# EAGLE board transmitter (EAGLE 5.11)
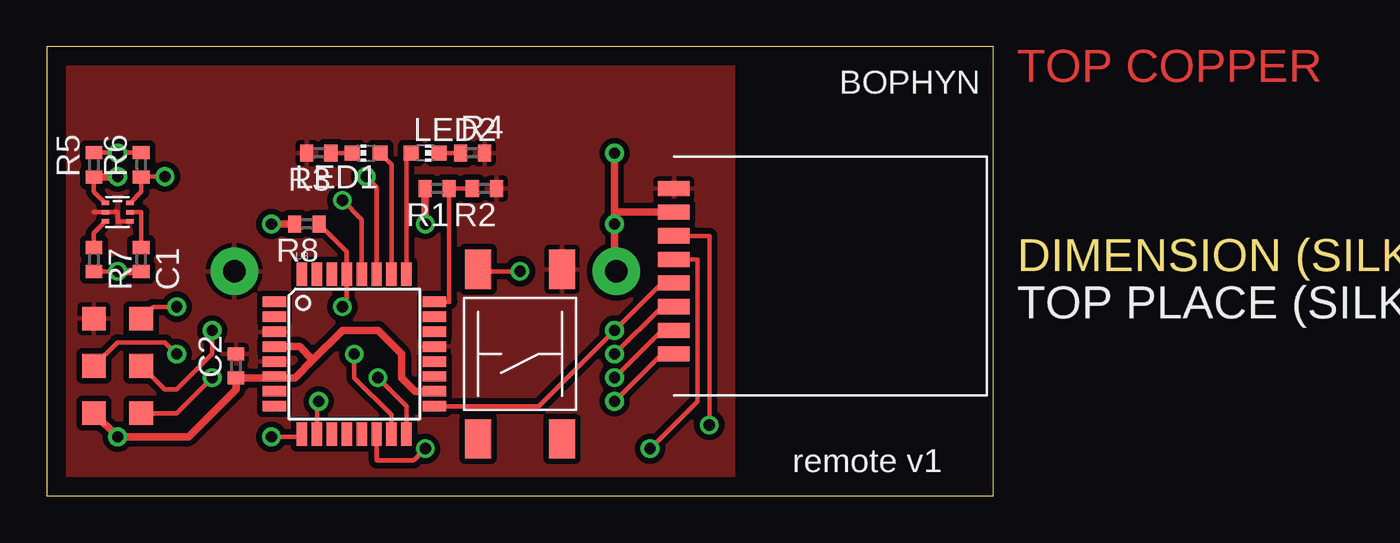
[diagram p0: board, top side]
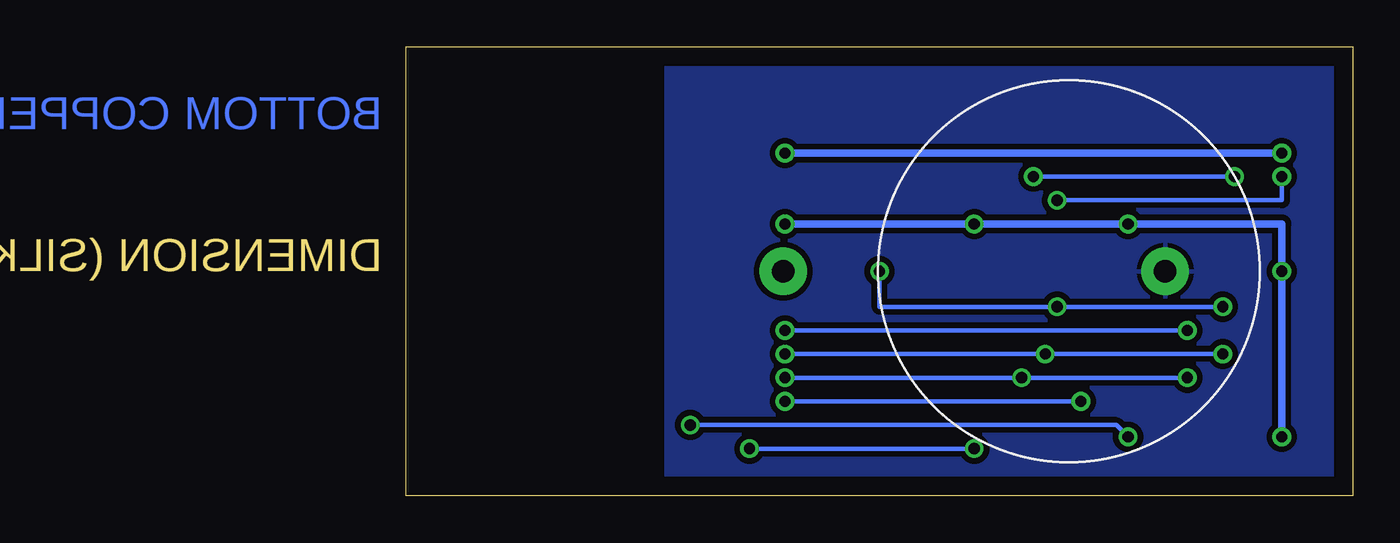
[diagram p1: board, bottom side, seen from below]

Size 50.8 x 24.13 mm. Coordinates in mm from the lower left corner, seen from the top.
Outline: 0,0 50.8,0 50.8,24.13 0,24.13 0,0
Copper layers (1*16): Top 0.035mm / dielectric 1.5mm / Bottom 0.035mm
Design rules "8mils": minimum track width 8mil, minimum drill 0.6mm, track to track 8mil, track to pad 8mil, pad to pad 8mil, via to via 8mil, smd to smd 8mil, copper to edge 40mil, drill to drill 10mil, minimum pad ring 10mil, minimum via ring 8mil, stop-mask expansion 0mil, vias tented up to drill 0mil, thermal gap 10mil

## Footprints (pad centres in the part's own frame; a part is rotated, then mirrored left to right if it is on the bottom)
C0402 = smd 0.7 x 0.9: 1 -0.65,0; 2 0.65,0
CHIP-LED0603 = smd 0.8 x 0.8: A 0,-0.75; C 0,0.75
R0402 = smd 0.7 x 0.9: 1 -0.65,0; 2 0.65,0
CUSTOM = smd 0.813 x 1.676: CE 2.54,0; CSN 3.81,0; GND 0,0; IRQ 8.89,0; MISO 7.62,0; MOSI 6.35,0; SCK 5.08,0; VDD 1.27,0
SOT563 = smd 0.25 x 0.4: 1 -0.5,-0.66; 2 0,-0.66; 3 0.5,-0.66; 4 0.5,0.66; 5 0,0.66; 6 -0.5,0.67
TQFP32-08 = smd 1.27 x 0.559: 1 -4.293,2.8; 2 -4.293,2; 3 -4.293,1.2; 4 -4.293,0.4; 5 -4.293,-0.4; 6 -4.293,-1.2; 7 -4.293,-2; 8 -4.293,-2.8; 17 4.293,-2.8; 18 4.293,-2; 19 4.293,-1.2; 20 4.293,-0.4; 21 4.293,0.4; 22 4.293,1.2; 23 4.293,2; 24 4.293,2.8 | smd 0.559 x 1.27: 9 -2.8,-4.293; 10 -2,-4.293; 11 -1.2,-4.293; 12 -0.4,-4.293; 13 0.4,-4.293; 14 1.2,-4.293; 15 2,-4.293; 16 2.8,-4.293; 25 2.8,4.293; 26 2,4.293; 27 1.2,4.293; 28 0.4,4.293; 29 -0.4,4.293; 30 -1.2,4.293; 31 -2,4.293; 32 -2.8,4.293
ISP-6 = smd 1.27 x 1.27: 1 0,0; 2 0,2.54; 3 2.54,0; 4 2.54,2.54; 5 5.08,0; 6 5.08,2.54
CR2032 = drill 1.2 pad 2.54 round: + -10.25,0; - 10.25,0
FSM4JSMA = smd 1.4 x 2.1: 1 2.25,4.55; 2 2.25,-4.55; 3 -2.25,4.55; 4 -2.25,-4.55

## Placement (x,y rotation side)
C1  0.1uF  [C0402]  5.08,12.7 270 top
C2  0.1uF  [C0402]  10.16,6.99 90 top
LED1  RED  [CHIP-LED0603]  17.14,18.41 90 top
LED2  GREEN  [CHIP-LED0603]  20.32,18.41 270 top
R1  1M  [R0402]  20.95,16.51 180 top
R2  500K  [R0402]  23.5,16.51 180 top
R3  1K  [R0402]  14.61,18.41 180 top
R4  1K  [R0402]  22.86,18.41 0 top
R5  1k  [R0402]  2.54,17.78 90 top
R6  1k  [R0402]  5.08,17.78 90 top
R7  1k  [R0402]  2.54,12.7 270 top
R8  10K  [R0402]  13.97,14.61 180 top
RFM70  RFM70-DEVICE  [CUSTOM]  33.66,16.51 270 top
U1  TMP102  [SOT563]  3.81,15.24 270 top
U3  ATMEGA168  [TQFP32-08]  16.51,7.62 0 top
U$2  ISP-6  [ISP-6]  5.08,4.45 90 top
U$3  CR2032  [CR2032]  20.32,12.06 0 bottom
U$4  FSM4JSMA  [FSM4JSMA]  25.4,7.62 180 top

## Library data of the parts
C1 C2 R1-R8 = resistor
LED1 LED2 = led
RFM70 U$2-U$4 = custom
U1 U3 = SparkFun

## Nets
GND: C2.2 R2.1 R3.2 R4.2 RFM70.GND U1.2 U1.4 U3.3 U3.5 U3.21 U$2.6 U$3.- U$4.4
GREEN_LED: LED2.A U3.25
MISO: RFM70.MISO U3.16 U$2.1
MOSI: RFM70.MOSI U3.15 U$2.4
N$1: LED1.C R3.1
N$2: LED2.C R4.1
N$3: R7.1 U1.3
N$4: C1.1 U1.5
RADIO_ENABLE: RFM70.CE U3.9
RADIO_IRQ: RFM70.IRQ U3.10
RED_LED: LED1.A U3.26
RESET: R8.1 U3.29 U$2.5 U$4.2
SCK: RFM70.SCK U3.17 U$2.3
SCL: R5.1 U1.1 U3.28
SDA: R6.1 U1.6 U3.27
SS: RFM70.CSN U3.14
VCC: C1.2 C2.1 R1.2 R5.2 R6.2 R7.2 R8.2 RFM70.VDD U3.4 U3.6 U3.18 U$2.2 U$3.+
VTEST: R1.1 R2.2 U3.24

## Tracks (layer width: path | path; a pad name or v marks a point on that pad's centre or on a via)
GND
  Top 0.254: U1.4 3.81,14.74 3.81,15.24 3.17,15.24 U1.2 2.54,15.24
  pour Top (isolate 0.305): 0,0 0,24.13 36.83,24.13 36.83,0
  pour Bottom (isolate 0.305): 0,0 0,24.13 36.83,24.13 36.83,0
GREEN_LED
  Top 0.254: U3.25 19.31,18.16 LED2.A
MISO  (via drill 0.6)
  Top 0.254: U$2.1 6.99,4.45 v8.89,6.35 | RFM70.MISO 33.02,8.89 v30.48,6.35 | U3.16 19.31,4.82 v17.78,6.35
  Bottom 0.254: v30.48,6.35 v17.78,6.35 v8.89,6.35
MOSI  (via drill 0.6)
  Top 0.254: RFM70.MOSI 33.02,10.16 v30.48,7.62 | U$2.4 3.81,8.26 6.35,8.26 v6.99,7.62 | U3.15 18.51,4.35 16.51,6.35 v16.51,7.62
  Bottom 0.254: v30.48,7.62 v16.51,7.62 v6.99,7.62
N$1
  Top 0.254: LED1.C R3.1
N$2
  Top 0.254: LED2.C R4.1
N$3
  Top 0.254: U1.3 2.54,14.13 R7.1
N$4
  Top 0.254: U1.5 5.08,15.24 C1.1
RADIO_ENABLE  (via drill 0.6)
  Top 0.254: RFM70.CE 35.56,13.97 v35.56,3.81 | v12.06,3.17 13.56,3.17 U3.9
  Bottom 0.254: v35.56,3.81 12.7,3.81 v12.06,3.17
RADIO_IRQ  (via drill 0.6)
  Top 0.254: RFM70.IRQ 33.02,7.62 v30.48,5.08 | U3.10 14.51,4.99 v14.61,5.08
  Bottom 0.254: v14.61,5.08 v30.48,5.08
RED_LED
  Top 0.254: U3.26 18.51,17.8 LED1.A
RESET  (via drill 0.6)
  Top 0.254: v15.88,10.16 16.11,10.39 U3.29 16.11,13.12 R8.1 | v6.99,10.16 5.71,10.16 U$2.5 | 23.5,12.46 U$4.2 arc90 23.25,12.06 v25.4,12.06
  Bottom 0.254: v6.99,10.16 v15.88,10.16 25.4,10.16 v25.4,12.06
SCK  (via drill 0.6)
  Top 0.254: U$2.3 6.35,5.71 6.99,5.71 8.89,7.62 v8.89,8.89 | RFM70.SCK 33.02,11.43 v30.48,8.89 26.41,4.82 U3.17
  Bottom 0.254: v8.89,8.89 v30.48,8.89
SCL  (via drill 0.6)
  Top 0.254: R5.1 2.54,16.35 U1.1 | v15.88,15.88 16.91,14.84 U3.28
  Top 0.406: R5.1 v3.81,17.13 v3.81,17.14
  Bottom 0.254: v15.88,15.88 3.81,15.88 v3.81,17.14
SDA  (via drill 0.6)
  Top 0.254: 17.78,11.91 U3.27 17.71,16.58 v17.14,17.14 | v6.35,17.14 5.09,17.14 R6.1 5.08,16.34 U1.6
  Bottom 0.254: v6.35,17.14 v17.14,17.14
SS  (via drill 0.6)
  Top 0.254: RFM70.CSN 34.92,12.7 34.92,5.08 v32.38,2.54 | v20.32,2.54 19.68,1.91 17.71,1.91 U3.14
  Bottom 0.254: v20.32,2.54 v32.38,2.54
VCC  (via drill 0.6)
  Top 0.254: v30.48,14.61 30.48,15.24 | 3.79,18.43 R5.2 | v3.81,18.41 3.79,18.43 | 3.79,18.43 R6.2 | 12.15,6.35 U3.6 | 3.79,12.05 R7.2
  Top 0.406: 3.79,12.05 v3.81,12.06 5.08,12.06 C1.2 5.07,12.06 | U$2.2 v3.81,3.17 7.62,3.17 10.16,5.71 C2.1 10.78,6.35 12.15,6.35 13.34,6.35 14.29,7.3 | v30.48,18.41 v30.48,14.61 30.48,12.06 U$3.+ | 30.48,15.24 RFM70.VDD | v12.06,14.61 R8.2 | U3.18 19.78,5.62 19.05,6.35 19.05,7.62 17.78,8.89 15.88,8.89 14.29,7.3 | U3.4 13.57,8.02 14.29,7.3 | v20.32,14.61 20.3,14.62 R1.2
  Bottom 0.406: v30.48,18.41 v3.81,18.41 | v30.48,14.61 v20.32,14.61 v12.06,14.61 3.81,14.61 v3.81,12.06 v3.81,3.17
VTEST
  Top 0.254: 20.95,10.57 U3.24 21.61,10.42 R1.1 R2.2

## Text on the board
Top: TOP COPPER
Bottom: BOTTOM COPPER
Dimension: DIMENSION (SILK)
tPlace: BOPHYN | TOP PLACE (SILK) | remote v1
tStop: TOP SOLDERMASK
bStop: BOTTOM SOLDERMASK